# Altium PCB Testkit_v2.PcbDoc
Units mm, origin at the board's own origin, x right, y up, seen from the top; angles counter-clockwise.
Board outline 70 x 70 mm, 2 copper layers (Top Layer, Bottom Layer); 15 components, 15 nets, 92 pads, 294 vias.
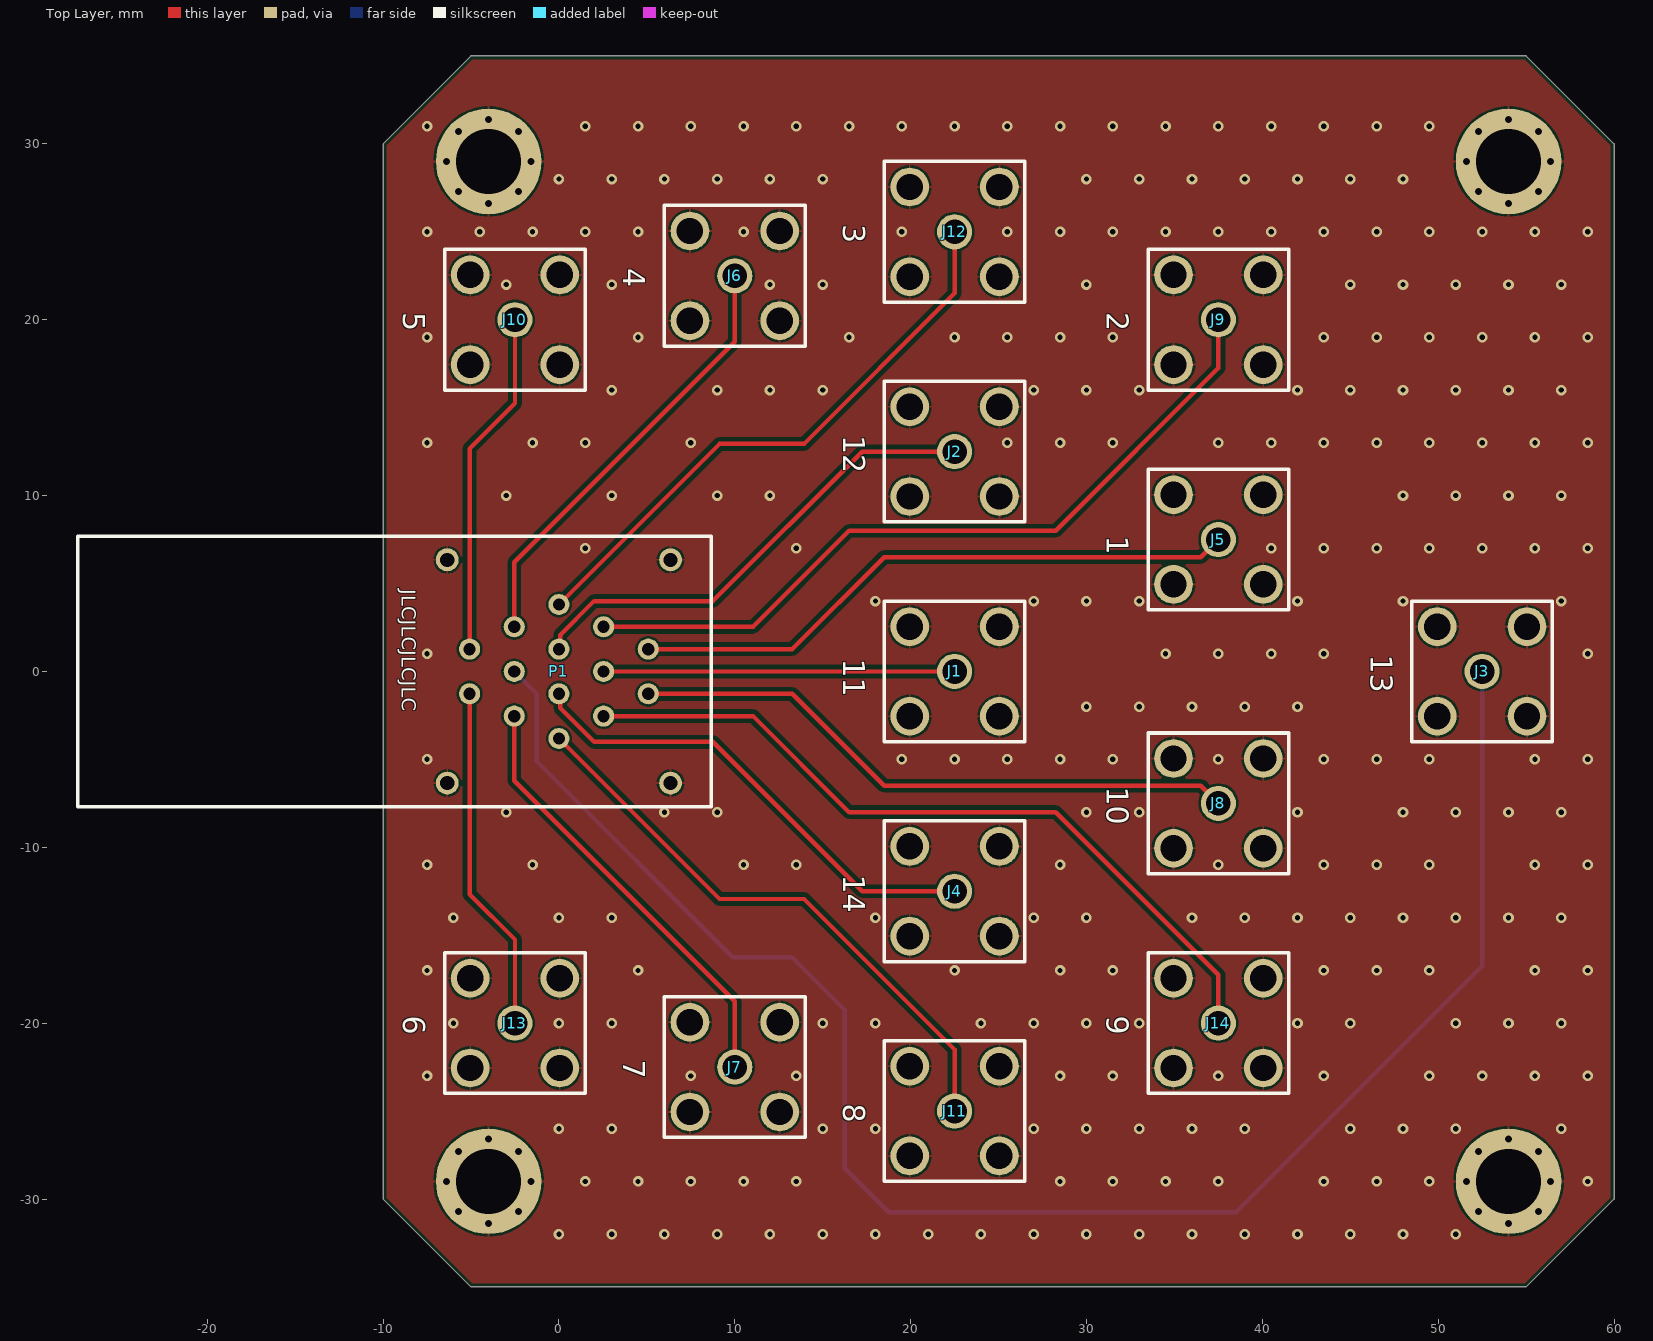
[diagram p0: Top Layer view]
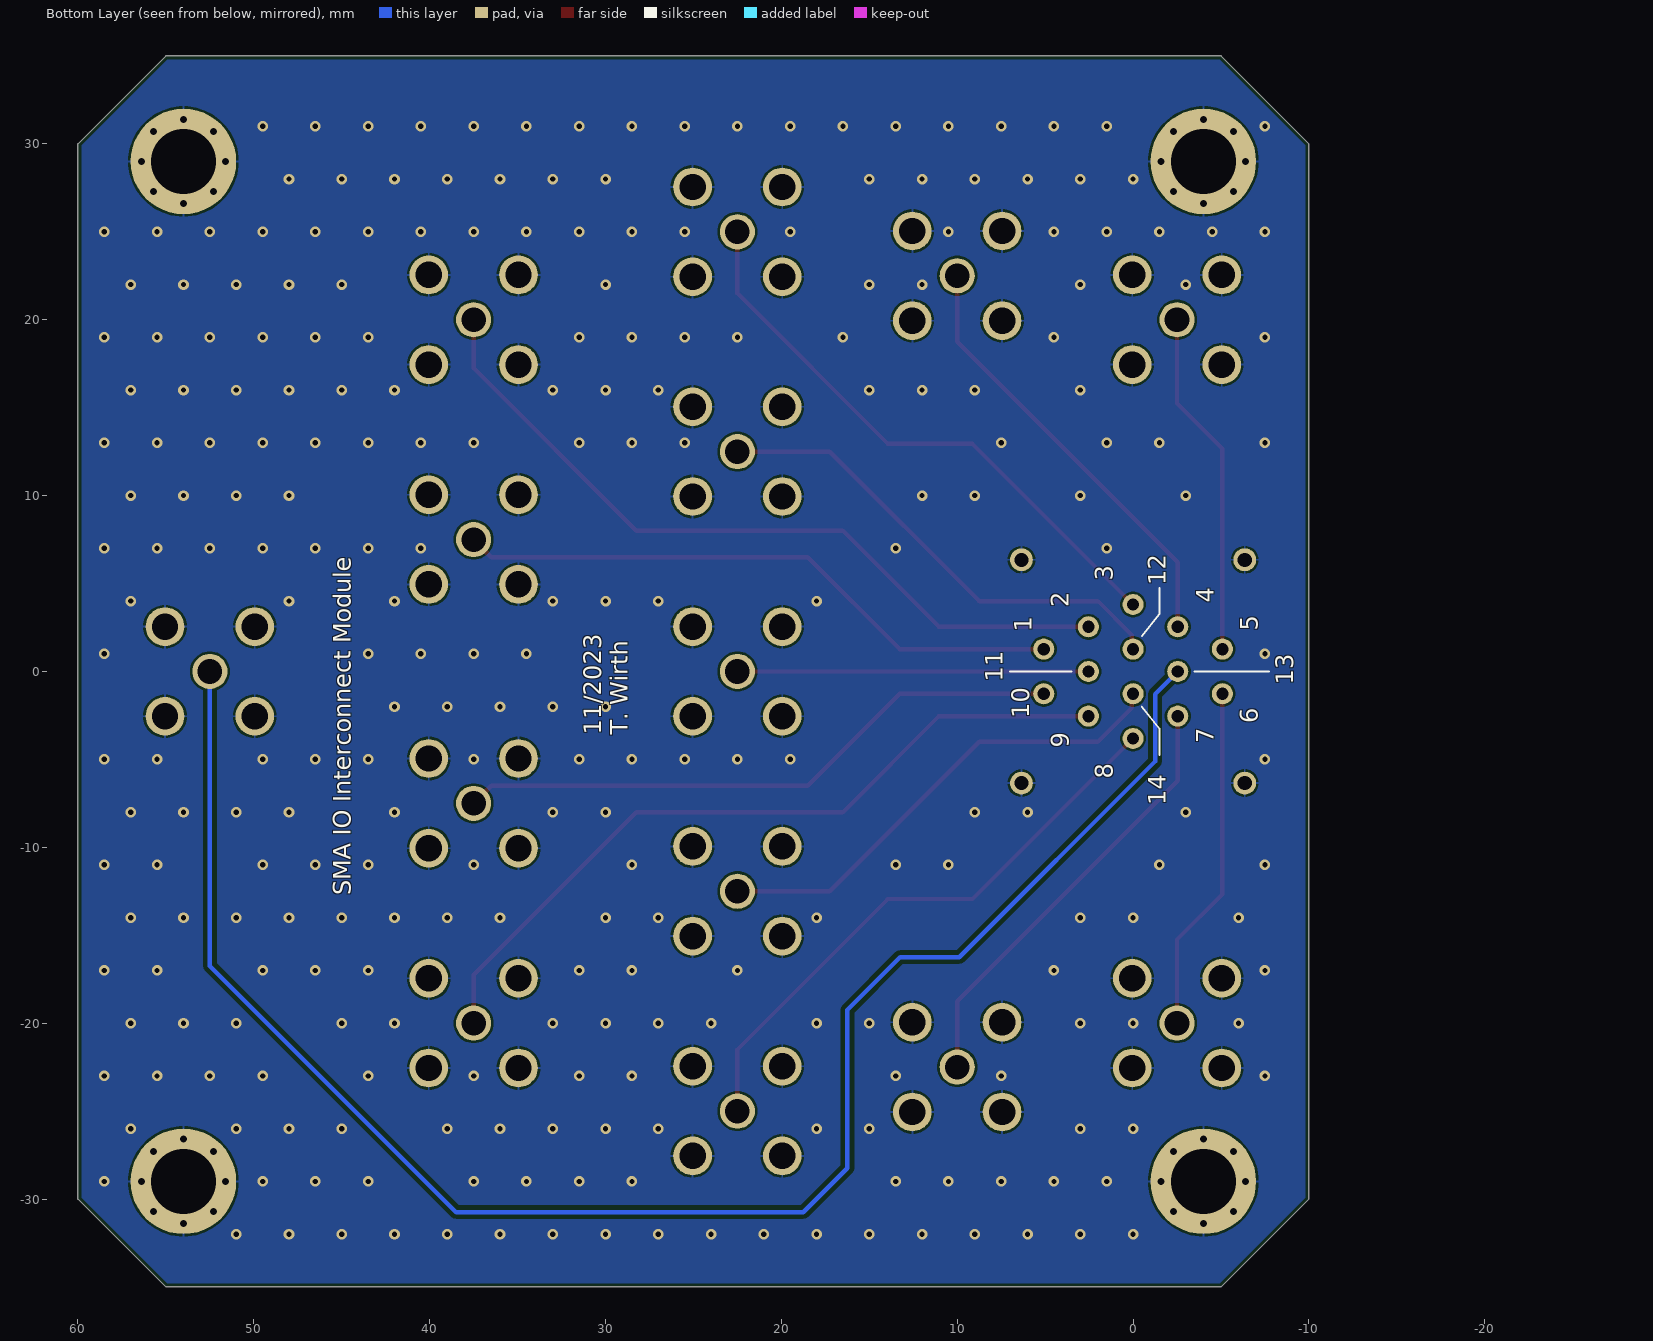
[diagram p1: Bottom Layer view, seen from below]
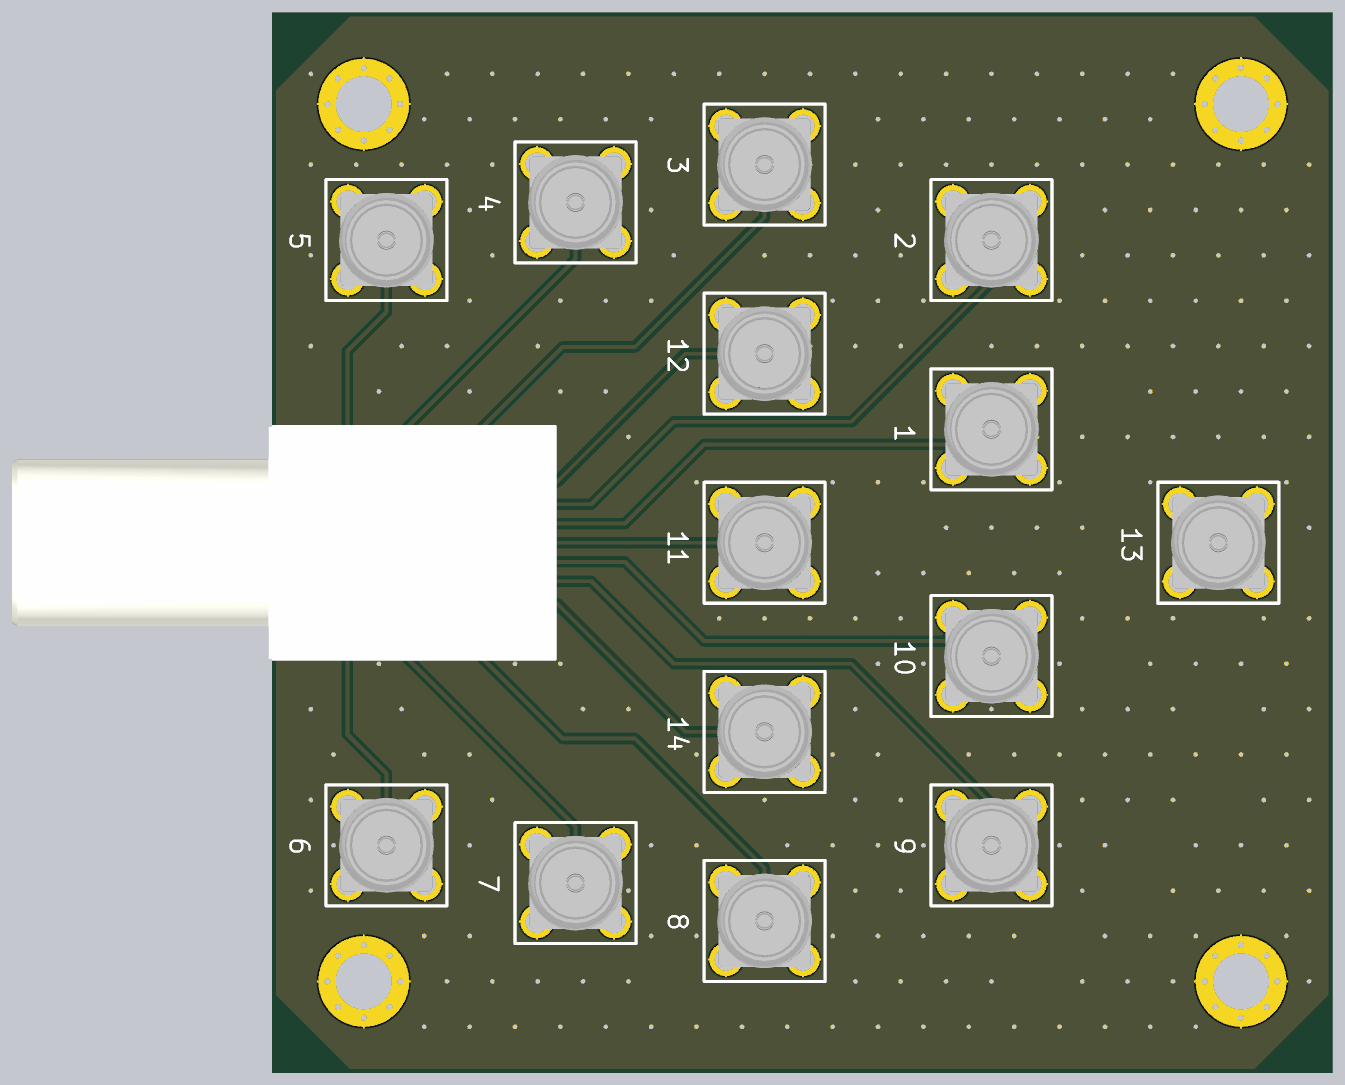
[diagram p2: 3D render of the assembled board from above, using the file's embedded part models]

## Layer stack, top to bottom
Top Solder: solder mask 0.0102, Solder Resist, Dk 3.5
Top Layer: signal copper 0.0356
Dielectric 1: dielectric 0.32, FR-4, Dk 4.8
Bottom Layer: signal copper 0.0356
Bottom Solder: solder mask 0.0102, Solder Resist, Dk 3.5

## Board outline
-10,-30 -5,-35 55,-35 60,-30 60,30 55,35 -5,35 -10,30

## Design rules (kind name [scope] priority, off if disabled: settings)
BoardOutlineClearance [All] p1: gap=0.2 ignorepadtopadclearanceinfootprint=FALSE
Clearance [All] p1: gap=0.127 ignorepadtopadclearanceinfootprint=FALSE except(0.25: Arc-Fill Arc-Poly Arc-Region Arc-Hole Track-Fill Track-Poly Track-Region Track-Hole SMDPad-Hole THPad-Hole Via-Hole Fill-Hole Poly-Hole Region-Hole Text-Hole)
ComponentClearance [All] p1: gap=0.127 collisioncheckmode=3 verticalgap=0.127 showdistances=TRUE
DiffPairsRouting [All] p1: maxlimit=0.254 minlimit=0.127 mostfreqgap=0.127 toplayer_minwidth=0.127 toplayer_maxwidth=25.4 toplayer_prefwidth=0.127 bottomlayer_minwidth=0.127 bottomlayer_maxwidth=25.4 bottomlayer_prefwidth=0.127 maxuncoupledlength=12.7
Height [All] p1: minheight=0 maxheight=1816.048 prefheight=12.7
HoleSize [All] p1: absolutevalues=TRUE maxlimit=6.3 minlimit=0.3 maxpercent=80.000 minpercent=20.000
HoleToHoleClearance [All] p1: gap=0.25 allowstackedmicrovias=FALSE
MinimumAnnularRing [All] p1: minimumring=0.076
MinimumSolderMaskSliver [All] p1: minsoldermaskwidth=0
PlaneClearance [All] p1: clearance=0.127
PlaneConnect PlaneConnectPowerPads [InPadClass('PowerPads')] p1: planeconnectstyle=Direct reliefexpansion=0.508 reliefentries=4 reliefconductorwidth=0.254 reliefairgap=0.254
PlaneConnect [All] p2: pad.planeconnectstyle=Relief pad.reliefexpansion=0.3 pad.reliefentries=4 pad.reliefconductorwidth=0.127 pad.reliefairgap=0.127 via.planeconnectstyle=Direct via.reliefexpansion=0.3 via.reliefentries=4 via.reliefconductorwidth=0.127 via.reliefairgap=0.127
PolygonConnect PolygonConnectPowerPads [All vs (InPadClass('PowerPads'))] p1: connectstyle=Direct reliefconductorwidth=0.254 reliefentries=4 polygonreliefangle="90 Angle" airgapwidth=0.254
PolygonConnect [All] p2: thpad.connectstyle=Relief thpad.reliefconductorwidth=0.127 thpad.reliefentries=4 thpad.polygonreliefangle="90 Angle" thpad.airgapwidth=0.127 smdpad.connectstyle=Relief smdpad.reliefconductorwidth=0.127 smdpad.reliefentries=4 smdpad.polygonreliefangle="90 Angle" smdpad.airgapwidth=0.127 via.connectstyle=Direct via.reliefconductorwidth=0.127 via.reliefentries=4 via.polygonreliefangle="90 Angle" via.airgapwidth=0.127
RoutingVias [All] p1: holewidth=0.3 width=0.6 viastyle="Through Hole" minholewidth=0.3 minwidth=0.6 maxholewidth=0.6 maxwidth=6.6
SilkToSilkClearance [All] p1: silktosilkclearance=0
SilkToSolderMaskClearance [IsPad] p1: minsilkscreentomaskgap=0.127 clearancetoexposedcopper=TRUE
SolderMaskExpansion [All] p1: expansion=0.075 istentingtop=FALSE
Width [All] p1: maxlimit=25.4 minlimit=0.127 preferedwidth=0.127 minimp=50.000000 maximp=50.000000 favimp=50.000000
20 further rules are at their usual default settings.

## Components (designator, comment, footprint, x,y, rotation, side; value= is the part's Value field where it differs from the comment)
J1 "SMA" SMA 22.5,0 r0 top
J2 "SMA" SMA 22.5,12.5 r0 top
J3 "SMA" SMA 52.5,0 r0 top
J4 "SMA" SMA 22.5,-12.5 r0 top
J5 "SMA" SMA 37.5,7.5 r0 top
J6 "SMA" SMA 10,22.5 r0 top
J7 "SMA" SMA 10,-22.5 r0 top
J8 "SMA" SMA 37.5,-7.5 r0 top
J9 "SMA" SMA 37.5,20 r0 top
J10 "SMA" SMA -2.5,20 r0 top
J11 "SMA" SMA 22.5,-25 r0 top
J12 "SMA" SMA 22.5,25 r0 top
J13 "SMA" SMA -2.5,-20 r0 top
J14 "SMA" SMA 37.5,-20 r0 top
P1 "EPG.1B.314.NLN" EPG.1B.314.NLN 0,0 r180 top

## Footprints (in the part's own frame and the unit in brackets; to place one, negate y for a bottom-side part, rotate by r counter-clockwise, add the part's x,y. Pads: shape width x height; smd on the part's side, far side on the other; paste and mask are expansions set on the pad)
EPG.1B.314.NLN [mil]
  round 47.24 hole 27.56: 1(-200,-50) 2(-100,-100) 3(0,-150) 4(100,-100) 5(200,-50) 6(200,50) 7(100,100) 8(0,150) 9(-100,100) 10(-200,50) 11(-100,0) 12(0,-50) 13(100,0) 14(0,50)
  round 51.18 hole 31.5: 15(-250,-250) 16(250,-250) 17(250,250) 18(-250,250)
  silkscreen extent -341,-303 1077,303, body extent -343,-303 1075,303, height 554
SMA [mm]
  round 2 hole 1.4: 1(0,0)
  round 2.2 hole 1.5: 2(-2.55,-2.55) 2(-2.55,2.55) 2(2.55,-2.55) 2(2.55,2.55)
  silkscreen extent -4,-4 4,4, body extent -3.13,-3.13 3.13,3.13, height 9.55

## Part data
P1: "LEMO Connector - 14 pin EPG.1B.314.NLN Elbow receptacle for printed circuit (solder mount), Female Contact Drawing Rev. 00 Source: http://www.lemo.com/catalog/ROW/UK_English/unipole_multipole.pdf"

## Free pads (board coordinates)
  round 6 hole 3.7 mask+0.102: 0(-4,-29) 0(-4,29) 0(54,-29) 0(54,29)

## Via types
v1: diameter 0.6, hole 0.3, Top Layer to Bottom Layer, tented both sides, 262 vias
v2: diameter 0.8, hole 0.4, Top Layer to Bottom Layer, tented both sides, 32 vias

## Nets (pads, with @x,y where several pads share a name; then routed paths per layer and width w, separated by ;. In a path a pad name is that pad's centre, name@x,y a point inside that pad or via, vN(x,y) a via of type N, cw(c..) or ccw(c..) an arc to the next point about the centre after c; other vN are vias at no path point)
1: J5.1 P1.1 | length 35
  Top Layer w0.25: P1.1 13.27,1.27 18.5,6.5 36.5,6.5 J5.1
2: J9.1 P1.2 | length 43.8
  Top Layer w0.25: P1.2 11.04,2.54 16.5,8 28.25,8 37.5,17.25 J9.1
3: J12.1 P1.3 | length 33.3
  Top Layer w0.25: P1.3 9.131,12.941 13.941,12.941 22.5,21.5 J12.1
4: J6.1 P1.4 | length 25.2
  Top Layer w0.25: P1.4 -2.54,6.21 10,18.75 J6.1
5: J10.1 P1.5 | length 19.8
  Top Layer w0.25: P1.5 -5.08,12.67 -2.5,15.25 J10.1
6: J13.1 P1.6 | length 19.8
  Top Layer w0.25: P1.6 -5.08,-12.67 -2.5,-15.25 J13.1
7: J7.1 P1.7 | length 25.2
  Top Layer w0.25: P1.7 -2.54,-6.21 10,-18.75 J7.1
8: J11.1 P1.8 | length 33.3
  Top Layer w0.25: P1.8 9.131,-12.941 13.941,-12.941 22.5,-21.5 J11.1
9: J14.1 P1.9 | length 43.8
  Top Layer w0.25: P1.9 11.04,-2.54 16.5,-8 28.25,-8 37.5,-17.25 J14.1
10: J8.1 P1.10 | length 35
  Top Layer w0.25: P1.10 13.27,-1.27 18.5,-6.5 36.5,-6.5 J8.1
11: J1.1 P1.11 | length 20
  Top Layer w0.25: P1.11 J1.1
12: J2.1 P1.12 | length 27.6
  Top Layer w0.25: P1.12 0.074,1.344 0.074,2.074 2,4 8.75,4 17.25,12.5 J2.1
13: J3.1 P1.13 | length 97.8
  Bottom Layer w0.25: P1.13 -1.25,-1.29 -1.25,-5.12 9.88,-16.25 13.25,-16.25 16.25,-19.25 16.25,-28.25 18.75,-30.75 38.5,-30.75 52.5,-16.75 J3.1
14: J4.1 P1.14 | length 27.6
  Top Layer w0.25: P1.14 0.074,-1.344 0.074,-2.074 2,-4 8.75,-4 17.25,-12.5 J4.1
GND: J1.2 J2.2 J3.2 J4.2 J5.2 J6.2 J7.2 J8.2 J9.2 J10.2 J11.2 J12.2 J13.2 J14.2 P1.15 P1.16 P1.17 P1.18 pad.0
  other v1: 0,-32 3,-32 6,-32 9,-32 12,-32 15,-32 18,-32 21,-32 24,-32 27,-32 30,-32 33,-32 36,-32 39,-32 42,-32 45,-32 48,-32 51,-32 1.5,-29 4.5,-29 7.5,-29 10.5,-29 13.5,-29 28.5,-29 31.5,-29 34.5,-29 37.5,-29 43.5,-29 46.5,-29 49.5,-29 58.5,-29 0,-26 3,-26 15,-26 18,-26 27,-26 30,-26 33,-26 36,-26 39,-26 45,-26 48,-26 51,-26 57,-26 -7.5,-23 7.5,-23 13.5,-23 28.5,-23 31.5,-23 37.5,-23 43.5,-23 49.5,-23 52.5,-23 55.5,-23 58.5,-23 -6,-20 0,-20 3,-20 15,-20 18,-20 24,-20 27,-20 30,-20 33,-20 42,-20 45,-20 51,-20 54,-20 57,-20 -7.5,-17 4.5,-17 22.5,-17 28.5,-17 31.5,-17 43.5,-17 46.5,-17 49.5,-17 55.5,-17 58.5,-17 -6,-14 0,-14 3,-14 18,-14 27,-14 30,-14 36,-14 39,-14 42,-14 45,-14 48,-14 51,-14 54,-14 57,-14 -7.5,-11 -1.5,-11 10.5,-11 13.5,-11 28.5,-11 37.5,-11 43.5,-11 46.5,-11 49.5,-11 55.5,-11 58.5,-11 -3,-8 6,-8 9,-8 30,-8 33,-8 42,-8 48,-8 51,-8 54,-8 57,-8 -7.5,-5 19.5,-5 22.5,-5 25.5,-5 28.5,-5 31.5,-5 37.5,-5 43.5,-5 46.5,-5 49.5,-5 55.5,-5 58.5,-5 30,-2 33,-2 36,-2 39,-2 42,-2 -7.5,1 34.5,1 37.5,1 40.5,1 43.5,1 58.5,1 18,4 27,4 30,4 33,4 42,4 48,4 57,4 1.5,7 13.5,7 40.5,7 43.5,7 46.5,7 49.5,7 52.5,7 55.5,7 58.5,7 -3,10 3,10 9,10 12,10 48,10 51,10 54,10 57,10 -7.5,13 -1.5,13 1.5,13 7.5,13 25.5,13 28.5,13 31.5,13 37.5,13 40.5,13 43.5,13 46.5,13 49.5,13 52.5,13 55.5,13 58.5,13 3,16 9,16 12,16 15,16 27,16 30,16 33,16 42,16 45,16 48,16 51,16 54,16 57,16 -7.5,19 4.5,19 16.5,19 22.5,19 25.5,19 28.5,19 31.5,19 43.5,19 46.5,19 49.5,19 52.5,19 55.5,19 58.5,19 -3,22 3,22 12,22 15,22 30,22 45,22 48,22 51,22 54,22 57,22 -7.5,25 -4.5,25 -1.5,25 1.5,25 4.5,25 10.5,25 19.5,25 25.5,25 28.5,25 31.5,25 34.5,25 37.5,25 40.5,25 43.5,25 46.5,25 49.5,25 52.5,25 55.5,25 58.5,25 0,28 3,28 6,28 9,28 12,28 15,28 30,28 33,28 36,28 39,28 42,28 45,28 48,28 -7.5,31 1.5,31 4.5,31 7.5,31 10.5,31 13.5,31 16.5,31 19.5,31 22.5,31 25.5,31 28.5,31 31.5,31 34.5,31 37.5,31 40.5,31 43.5,31 46.5,31 49.5,31
  other v2: -4,-31.4 54,-31.4 -5.7,-30.7 -2.3,-30.7 52.3,-30.7 55.7,-30.7 -6.4,-29 -1.6,-29 51.6,-29 56.4,-29 -5.7,-27.3 -2.3,-27.3 52.3,-27.3 55.7,-27.3 -4,-26.6 54,-26.6 -4,26.6 54,26.6 -5.7,27.3 -2.3,27.3 52.3,27.3 55.7,27.3 -6.4,29 -1.6,29 51.6,29 56.4,29 -5.7,30.7 -2.3,30.7 52.3,30.7 55.7,30.7 -4,31.4 54,31.4

## Polygon pours and split planes (outlines as drawn)
GND on Bottom Layer "NONET_L-01_P-001" (solid, pour order 0): -15,37.5 65,37.5 65,-37.5 -15,-37.5
GND on Top Layer "NONET_L-01_P-001" (solid, pour order 1): -15,37.5 65,37.5 65,-37.5 -15,-37.5

## Silkscreen, mask and mechanical layers (free items; w line width, h text height)
Top Overlay:
  text "3" at 16.155,25.417 h1.25 r270
  text "4" at 3.655,22.917 h1.25 r270
  text "5" at -8.845,20.417 h1.25 r270
  text "2" at 31.155,20.417 h1.25 r270
  text "12" at 16.155,13.437 h1.25 r270
  text "1" at 31.155,7.708 h1.25 r270
  text "JLCJLCJLCJLC" at -8.95,4.665 h0.8 r270
  text "13" at 46.155,0.937 h1.25 r270
  text "11" at 16.155,0.729 h1.25 r270
  text "10" at 31.155,-6.563 h1.25 r270
  text "14" at 16.155,-11.563 h1.25 r270
  text "6" at -8.845,-19.583 h1.25 r270
  text "9" at 31.155,-19.583 h1.25 r270
  text "7" at 3.655,-22.083 h1.25 r270
  text "8" at 16.155,-24.583 h1.25 r270
Bottom Overlay:
  lines w0.1: -7.75,0 -3.5,0 ; -1.5,-4.75 -1.5,-3.25 -0.5,-2 ; -1.5,4.75 -1.5,3.25 -0.5,2 ; 3.5,0 7,0
  text "3" at 1.155,5.155 h1 r270
  text "12" at -1.845,4.905 h1 r270
  text "4" at -4.595,3.917 h1 r270
  text "2" at 3.655,3.655 h1 r270
  text "5" at -7.095,2.305 h1 r270
  text "1" at 5.75,2.25 h1 r270
  text "11" at 7.405,-0.583 h1 r270
  text "13" at -9.095,-0.75 h1 r270
  text "10" at 5.905,-2.655 h1 r270
  text "6" at -7.095,-2.945 h1 r270
  text "11/2023 / T. Wirth" at 28.75,-3.612 h1 r270
  text "7" at -4.595,-4.083 h1 r270
  text "9" at 3.655,-4.345 h1 r270
  text "8" at 1.155,-6.095 h1 r270
  text "14" at -1.845,-7.595 h1 r270
  text "SMA IO Interconnect Module" at 44.5,-12.737 h1 r270
Outline:
  the board outline again, w0.1